# Altium PCB cyu1pcb.PcbDoc
Units mm, origin at the board's own origin, x right, y up, seen from the top; angles counter-clockwise.
Board outline 73.15 x 68.45 mm, 2 copper layers (Top Layer, Bottom Layer); 41 components, 44 nets, 116 pads, 4 vias.
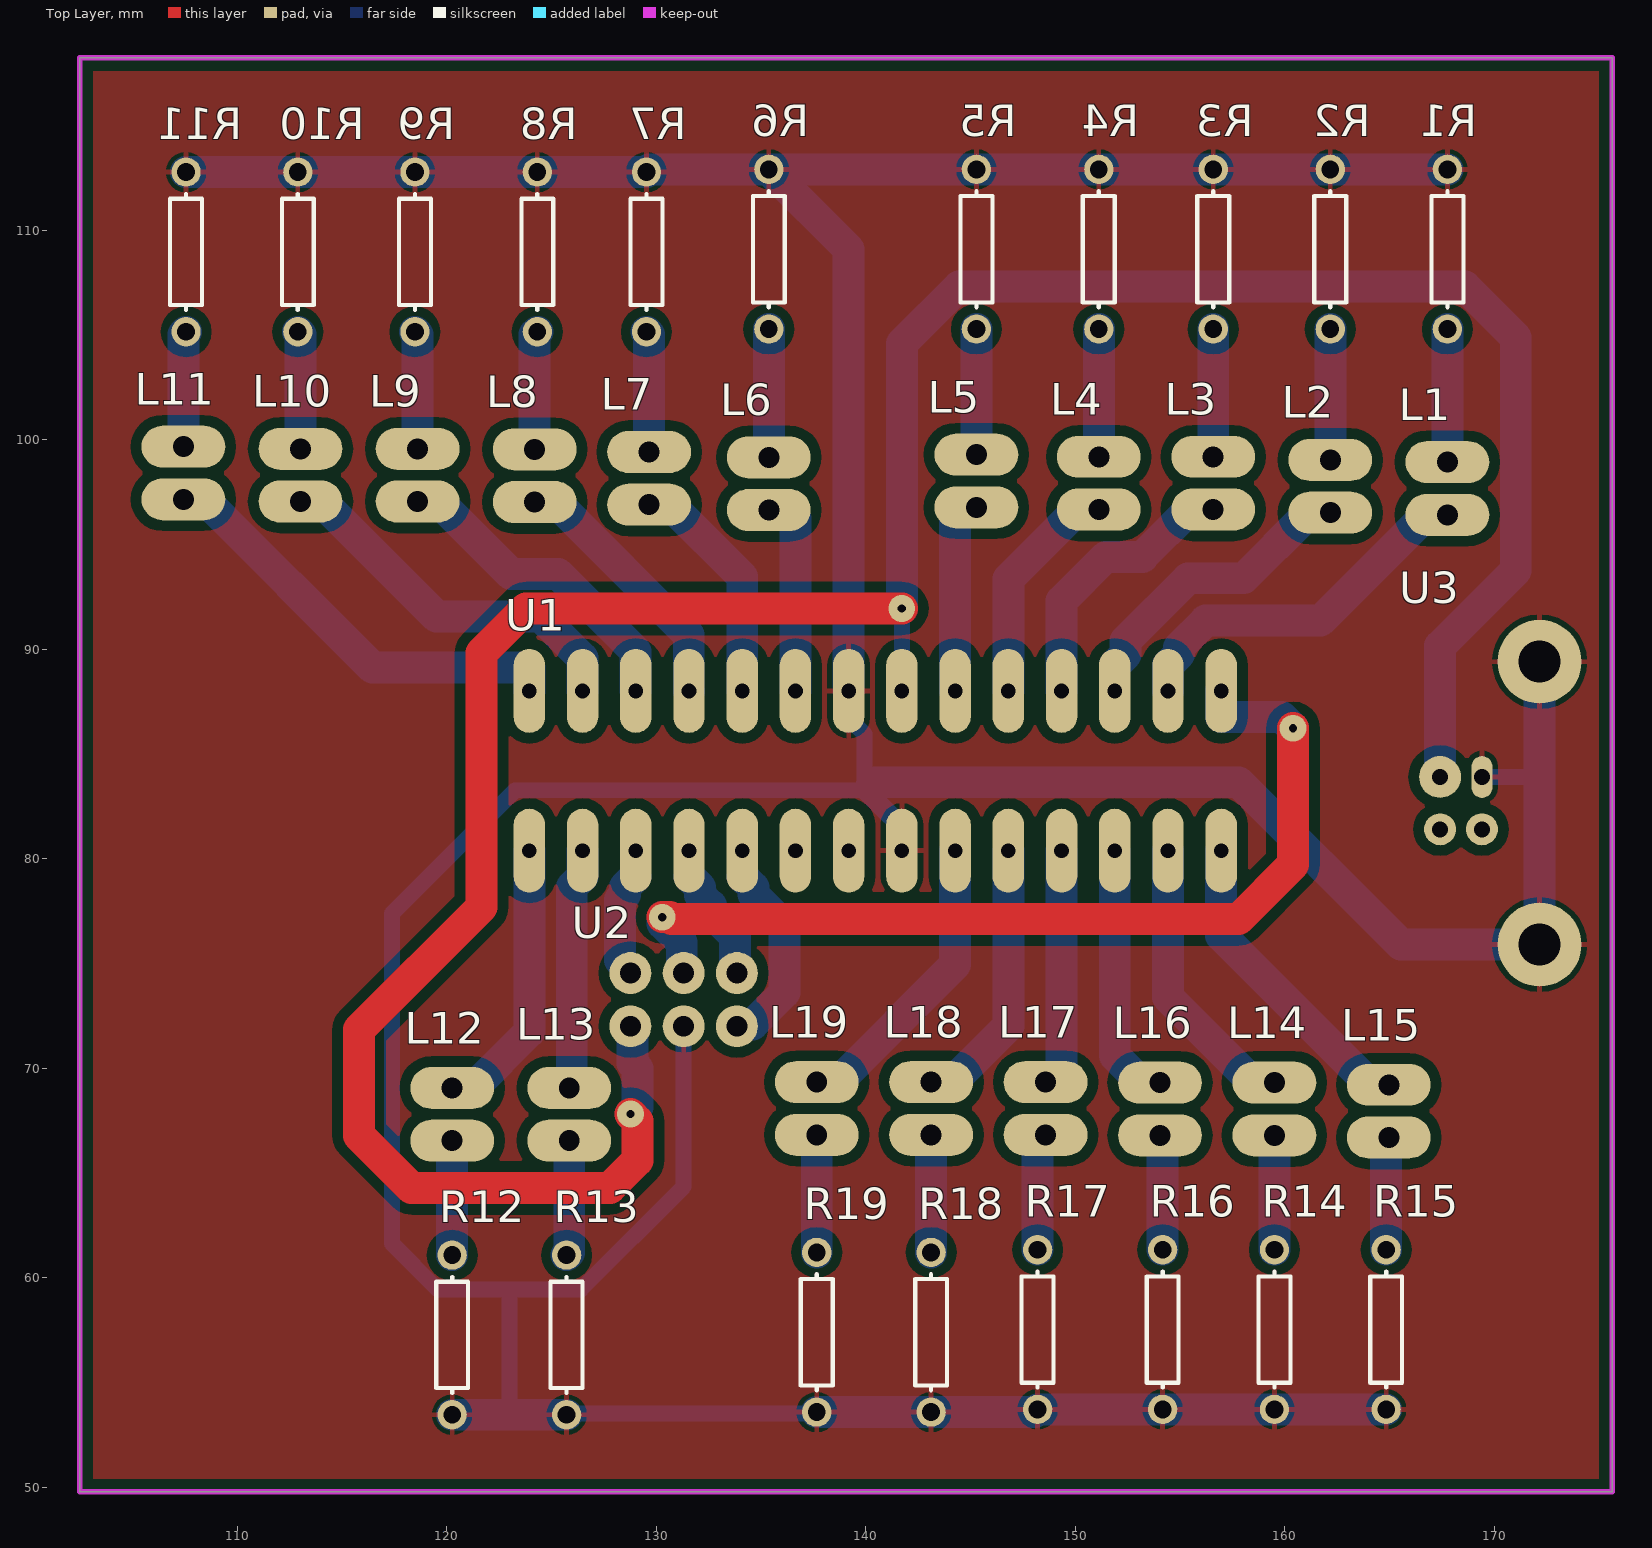
[diagram p0: Top Layer view]
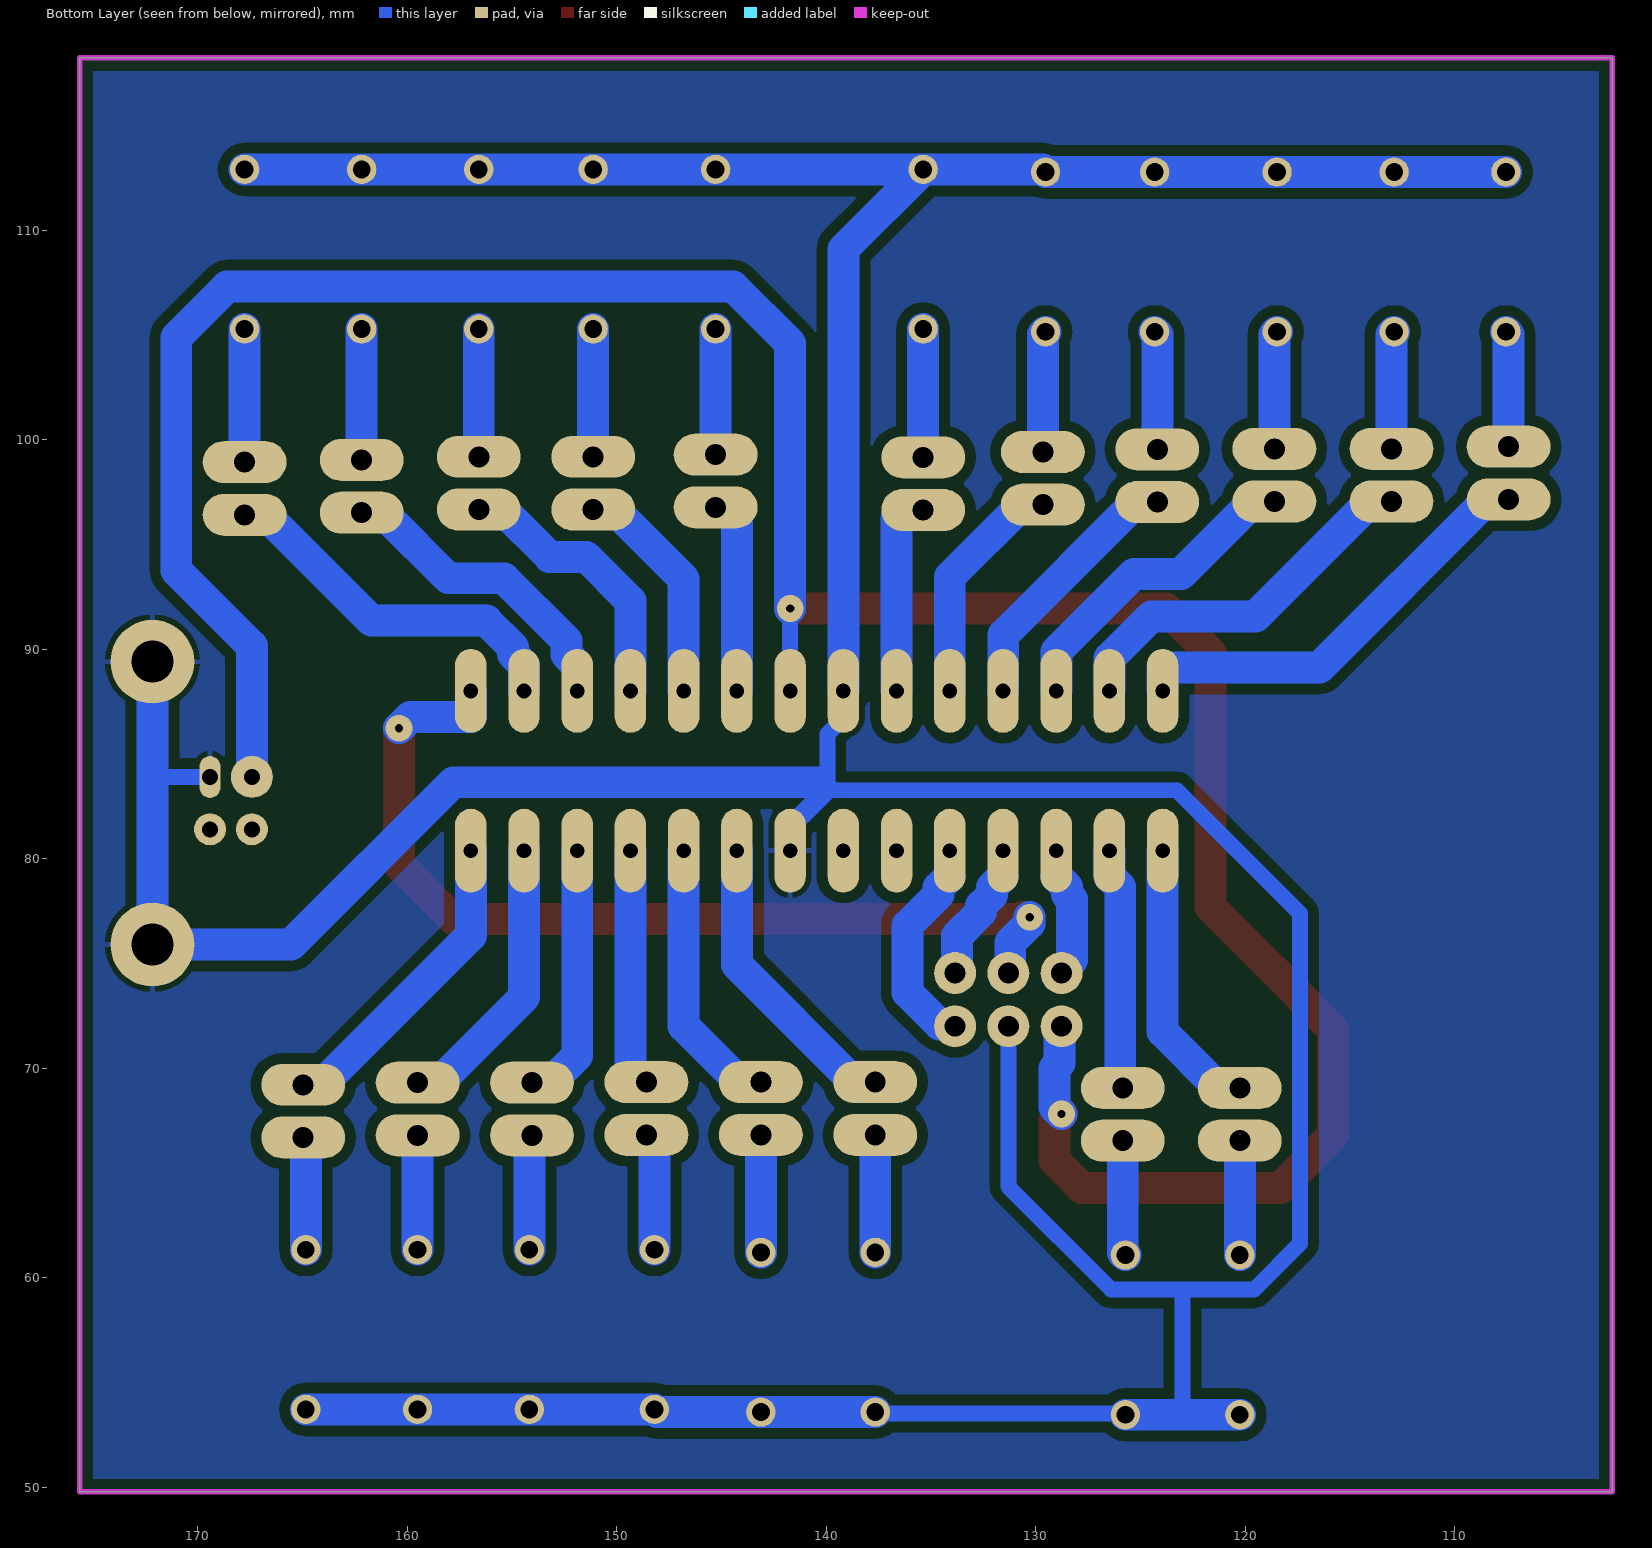
[diagram p1: Bottom Layer view, seen from below]
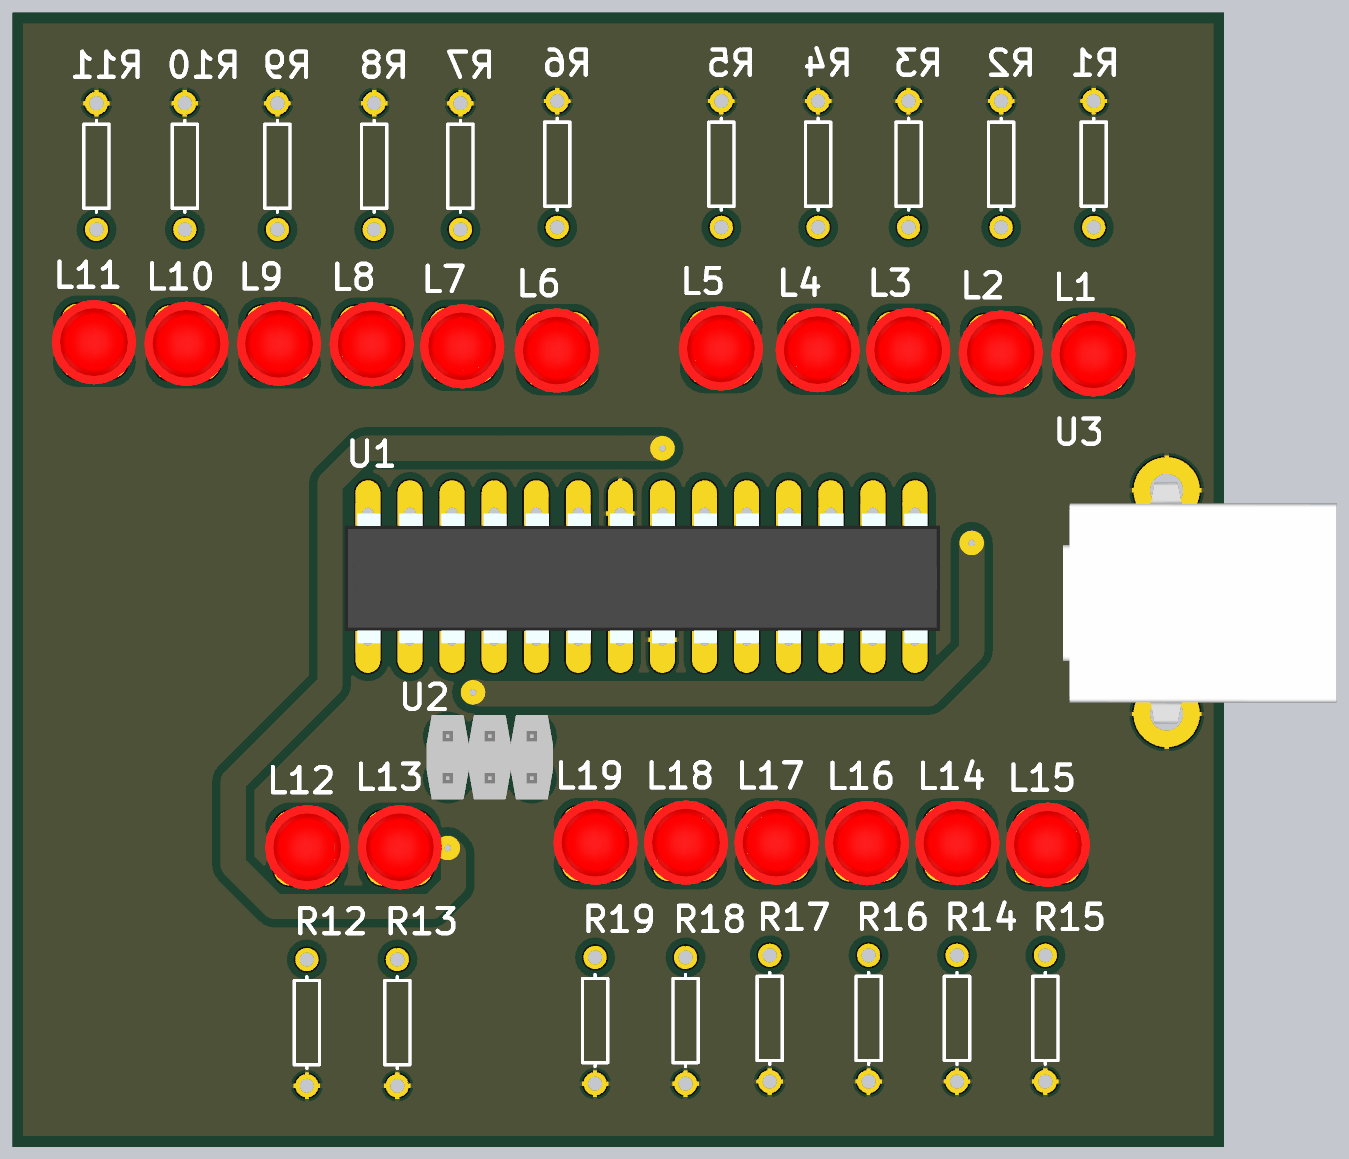
[diagram p2: 3D render of the assembled board from above, using the file's embedded part models]

## Layer stack, top to bottom
Top Solder: solder mask 0.0102, Solder Resist, Dk 3.5
Top Layer: signal copper 0.0356
Dielectric 1: dielectric 0.32, FR-4, Dk 4.8
Bottom Layer: signal copper 0.0356
Bottom Solder: solder mask 0.0102, Solder Resist, Dk 3.5

## Board outline
102.489,49.784 102.489,118.237 175.641,118.237 175.641,49.784

## Design rules (kind name [scope] priority, off if disabled: settings)
Clearance [All] p1: gap=0.5 ignorepadtopadclearanceinfootprint=FALSE
PolygonConnect [All] p1: connectstyle=Relief reliefconductorwidth=0.254 reliefentries=4 polygonreliefangle="90 Angle" airgapwidth=0.254
RoutingVias [All] p1: holewidth=0.711 width=1.27 viastyle="Through Hole" minholewidth=0.711 minwidth=1.27 maxholewidth=0.711 maxwidth=1.27
SolderMaskExpansion [All] p1: expansion=0.102 istentingtop=FALSE
Width [All] p1: maxlimit=1.524 minlimit=0.508 preferedwidth=0.762
30 further rules are at their usual default settings.

## Components (designator, comment, footprint, x,y, rotation, side; value= is the part's Value field where it differs from the comment)
L1 "LED" LEDth 167.767,96.393 r0 top value=Red
L2 "LED" LEDth 162.179,96.495 r0 top value=Red
L3 "LED" LEDth 156.591,96.647 r0 top value=Red
L4 "LED" LEDth 151.13,96.647 r0 top value=Red
L5 "LED" LEDth 145.288,96.749 r0 top value=Red
L6 "LED" LEDth 135.382,96.622 r0 top value=Red
L7 "LED" LEDth 129.667,96.876 r0 top value=Red
L8 "LED" LEDth 124.206,97.003 r0 top value=Red
L9 "LED" LEDth 118.618,97.028 r0 top value=Red
L10 "LED" LEDth 113.03,97.028 r0 top value=Red
L11 "LED" LEDth 107.442,97.13 r0 top value=Red
L12 "LED" LEDth 120.269,69.088 r180 top value=Red
L13 "LED" LEDth 125.857,69.088 r180 top value=Red
L14 "LED" LEDth 159.512,69.342 r180 top value=Red
L15 "LED" LEDth 164.973,69.24 r180 top value=Red
L16 "LED" LEDth 154.051,69.342 r180 top value=Red
L17 "LED" LEDth 148.59,69.367 r180 top value=Red
L18 "LED" LEDth 143.129,69.367 r180 top value=Red
L19 "LED" LEDth 137.668,69.367 r180 top value=Red
R1 "Res1" AXIAL-0.3 167.767,109.093 r270 top value=1K
R2 "Res1" AXIAL-0.3 162.179,109.093 r270 top value=1K
R3 "Res1" AXIAL-0.3 156.591,109.093 r270 top value=1K
R4 "Res1" AXIAL-0.3 151.13,109.093 r270 top value=1K
R5 "Res1" AXIAL-0.3 145.288,109.093 r270 top value=1K
R6 "Res1" AXIAL-0.3 135.382,109.093 r270 top value=1K
R7 "Res1" AXIAL-0.3 129.54,108.966 r270 top value=1K
R8 "Res1" AXIAL-0.3 124.333,108.966 r270 top value=1K
R9 "Res1" AXIAL-0.3 118.491,108.966 r270 top value=1K
R10 "Res1" AXIAL-0.3 112.903,108.966 r270 top value=1K
R11 "Res1" AXIAL-0.3 107.569,108.966 r270 top value=1K
R12 "Res1" AXIAL-0.3 120.269,57.277 r90 top value=1K
R13 "Res1" AXIAL-0.3 125.73,57.277 r90 top value=1K
R14 "Res1" AXIAL-0.3 159.512,57.531 r90 top value=1K
R15 "Res1" AXIAL-0.3 164.846,57.531 r90 top value=1K
R16 "Res1" AXIAL-0.3 154.178,57.531 r90 top value=1K
R17 "Res1" AXIAL-0.3 148.209,57.531 r90 top value=1K
R18 "Res1" AXIAL-0.3 143.129,57.404 r90 top value=1K
R19 "Res1" AXIAL-0.3 137.668,57.404 r90 top value=1K
U1 "Atmega88" ATMEGA328 156.972,88.011 r270 top
U2 "DebugWireISP" 6x2pinheader 133.858,74.549 r270 top
U3 "ETF USB B type" USB-B 179.918,83.157 r0 top value=Yes

## Footprints (in the part's own frame and the unit in brackets; to place one, negate y for a bottom-side part, rotate by r counter-clockwise, add the part's x,y. Pads: shape width x height; smd on the part's side, far side on the other; paste and mask are expansions set on the pad)
6x2pinheader [mm] "ETF 6x2 pin header"
  round 2 hole 1: 1(0,0) 2(2.54,0) 3(0,-2.54) 4(2.54,-2.54) 5(0,-5.08) 6(2.54,-5.08)
  body extent -1.29,-6.36 3.79,1.26, height 9.75
ATMEGA328 [mm]
  oval 4x1.5 hole 0.7: 1(0,0) 2(0,-2.54) 3(0,-5.08) 4(0,-7.62) 5(0,-10.16) 6(0,-12.7) 7(0,-15.24) 8(0,-17.78) 9(0,-20.32) 10(0,-22.86) 11(0,-25.4) 12(0,-27.94) 13(0,-30.48) 14(0,-33.02) 15(7.62,-33.02) 16(7.62,-30.48) 17(7.62,-27.94) 18(7.62,-25.4) 19(7.62,-22.86) 20(7.62,-20.32) 21(7.62,-17.78) 22(7.62,-15.24) 23(7.62,-12.7) 24(7.62,-10.16) 25(7.62,-7.62) 26(7.62,-5.08) 27(7.62,-2.54) 28(7.62,0)
  body extent -0.03,-34.42 7.85,1.52, height 4.65
AXIAL-0.3 [mm] "Axial Device, Thru-Hole; 2 Leads; 0.3 in Pin Spacing"
  round 1.4 hole 0.85: 1(-3.81,0) 2(3.81,0)
  silkscreen extent -2.77,-0.76 2.77,0.76
LEDth [mm]
  oval 4x2 hole 1: 1(0,2.54) 2(0,0.025)
  body extent -2.57,-1.32 2.53,3.78, height 8.6
USB-B [mm] "ETF USB port type B"
  round 2 hole 0.762: 1(-12.5,0.75)
  round 1.524 hole 0.762: 2(-12.5,-1.75) 3(-10.5,-1.75)
  oval 1x2 hole 0.762: 4(-10.5,0.75)
  round 4 hole 2: 4(-7.75,-7.25) 4(-7.75,6.25)
  body extent -14,-7.85 2.5,6.75, height 11.28

## Part data
L1 L2 L3 L4 L5 L6 L7 L8 L9 L10 L11 L12 L13 L14 L15 L16 L17 L18 L19: library part LEDth
R1 R2 R3 R4 R5 R6 R7 R8 R9 R10 R11 R12 R13 R14 R15 R16 R17 R18 R19: "Resistor", LatestRevisionDate=17-Jul-2002, LatestRevisionNote="Re-released for DXP Platform.", PackageDescription="Axial Device, Thru-Hole; 2 Leads; 0.3 in Pin Spacing", PackageReference=AXIAL-0.3, Published=8-Jun-2000, Publisher="Altium Limited"
U3: library part USB-B

## Via types
v1: diameter 1.27, hole 0.4, Top Layer to Bottom Layer, 4 vias

## Nets (pads, with @x,y where several pads share a name; then routed paths per layer and width w, separated by ;. In a path a pad name is that pad's centre, name@x,y a point inside that pad or via, vN(x,y) a via of type N, cw(c..) or ccw(c..) an arc to the next point about the centre after c; other vN are vias at no path point)
GND: R1.1 R2.1 R3.1 R4.1 R5.1 R6.1 R7.1 R8.1 R9.1 R10.1 R11.1 R12.1 R13.1 R14.1 R15.1 R16.1 R17.1 R18.1 R19.1 U1.8 U1.22 U2.4 U3.4 | length 266.6
  Bottom Layer w0.762: 122.936,53.467 122.999,53.53 122.999,59.444 ; R13.1 125.793,53.53 137.605,53.53 R19.1 ; U2.4 131.318,64.351 126.411,59.444 122.999,59.444 ; U1.8 139.192,86.708 139.954,85.946 139.954,83.272 ; U3.4@169.418,83.907 171.954,83.907 172.168,83.693 ; 122.999,59.444 119.588,59.444 117.388,61.644 117.388,77.384 123.276,83.272 139.954,83.272 ; 139.954,83.272 139.954,83.186 141.13,82.01 141.163,82.01 141.732,81.441 U1.22 141.732,81.641 140.101,83.272 139.954,83.272
  Bottom Layer w1.524: R11.1 R10.1 R9.1 R8.1 R7.1 129.667,112.903 R6.1 ; R12.1 122.936,53.467 R13.1 ; R19.1 R18.1 148.082,53.594 R17.1 R14.1 R15.1 ; U1.8 139.192,109.093 R6.1 ; 140.254,83.425 140.482,83.653 157.805,83.653 165.551,75.907 172.168,75.907 172.168,83.693 U3.4@172.168,89.407 ; R1.1 R2.1 R3.1 R4.1 R5.1 R6.1
MISO: U1.18 U2.1 | length 5.5
  Bottom Layer w1.524: U1.18@131.584,79.153 132.1,78.637 132.1,78.28 132.616,77.764 132.616,77.469 133.767,76.318 133.767,74.64 U2.1
MOSI: U1.17 U2.5 | length 5.1
  Bottom Layer w1.524: U2.5 128.778,74.678 128.278,75.178 128.278,78.054 128.516,78.292 128.516,78.649 U1.17@129.02,79.153
NetL1_1: L1.1 R1.2 | length 6.3
  Bottom Layer w1.524: L1.1 R1.2
NetL1_2: L1.2 U1.2 | length 17.7
  Bottom Layer w1.524: U1.2 154.432,89.237 154.96,89.765 154.96,90.094 156.232,91.367 161.716,91.367 166.767,96.418 L1.2
NetL2_1: L2.1 R2.2 | length 6.2
  Bottom Layer w1.524: L2.1 R2.2
NetL2_2: L2.2 U1.3 | length 13.7
  Bottom Layer w1.524: U1.3@151.904,89.249 152.408,89.753 152.408,90.405 155.394,93.391 158.05,93.391 161.024,96.365 162.024,96.365 L2.2
NetL3_1: L3.1 R3.2 | length 6.1
  Bottom Layer w1.524: L3.1 R3.2
NetL3_2: L3.2 U1.4 | length 13.3
  Bottom Layer w1.524: U1.4 149.352,92.297 151.465,94.41 153.206,94.41 155.468,96.672 L3.2
NetL4_1: L4.1 R4.2 | length 6.1
  Bottom Layer w1.524: L4.1 R4.2
NetL4_2: L4.2 U1.5 | length 11
  Bottom Layer w1.524: U1.5 146.812,93.354 150.13,96.672 L4.2
NetL5_1: L5.1 R5.2 | length 6
  Bottom Layer w1.524: L5.1 R5.2
NetL5_2: L5.2 U1.6 | length 9.7
  Bottom Layer w1.524: U1.6 144.272,96.554 144.492,96.774 L5.2
NetL6_1: L6.1 R6.2 | length 6.1
  Bottom Layer w1.524: L6.1 R6.2
NetL6_2: L6.2 U1.9 | length 9.7
  Bottom Layer w1.524: L6.2 136.253,96.647 136.652,96.248 U1.9
NetL7_1: L7.1 R7.2 | length 5.8
  Bottom Layer w1.524: R7.2 129.667,105.029 L7.1
NetL7_2: L7.2 U1.10 | length 11.3
  Bottom Layer w1.524: L7.2 130.667,96.901 134.112,93.456 U1.10
NetL8_1: L8.1 R8.2 | length 5.7
  Bottom Layer w1.524: L8.1 124.206,105.029 R8.2
NetL8_2: L8.2 U1.11 | length 12.7
  Bottom Layer w1.524: L8.2 125.206,97.028 131.56,90.674 131.56,88.023 U1.11
NetL9_1: L9.1 R9.2 | length 5.6
  Bottom Layer w1.524: R9.2 118.618,105.029 L9.1
NetL9_2: L9.2 U1.12 | length 15.3
  Bottom Layer w1.524: L9.2 119.618,97.053 123.08,93.591 125.33,93.591 129.02,89.901 129.02,88.023 U1.12
NetL10_1: L10.1 R10.2 | length 5.6
  Bottom Layer w1.524: R10.2 113.03,105.029 L10.1
NetL10_2: L10.2 U1.13 | length 18.1
  Bottom Layer w1.524: L10.2 114.03,97.053 119.516,91.567 124.491,91.567 126.48,89.578 126.48,88.023 U1.13
NetL11_1: L11.1 R11.2 | length 5.5
  Bottom Layer w1.524: L11.1 107.442,105.029 R11.2
NetL11_2: L11.2 U1.14 | length 20.9
  Bottom Layer w1.524: L11.2 108.442,97.155 116.467,89.13 123.94,89.13 123.952,89.118 U1.14
NetL12_1: L12.1 R12.2 | length 5.5
  Bottom Layer w1.524: R12.2 L12.1
NetL12_2: L12.2 U1.15 | length 13.4
  Bottom Layer w1.524: L12.2 121.269,69.063 123.952,71.746 U1.15
NetL13_1: L13.1 R13.2 | length 5.5
  Bottom Layer w1.524: R13.2 125.857,61.214 L13.1
NetL13_2: L13.2 U1.16 | length 11.6
  Bottom Layer w1.524: L13.2 125.976,69.182 125.976,78.649 126.492,79.165 U1.16
NetL14_1: L14.1 R14.2 | length 5.5
  Bottom Layer w1.524: R14.2 L14.1
NetL14_2: L14.2 U1.27 | length 13.8
  Bottom Layer w1.524: U1.27 154.432,73.397 158.512,69.317 L14.2
NetL15_1: L15.1 R15.2 | length 5.4
  Bottom Layer w1.524: R15.2 164.846,66.573 L15.1
NetL15_2: L15.2 U1.28 | length 15
  Bottom Layer w1.524: U1.28 156.972,76.345 164.102,69.215 L15.2
NetL16_1: L16.1 R16.2 | length 5.5
  Bottom Layer w1.524: L16.1 154.178,66.675 R16.2
NetL16_2: L16.2 U1.26 | length 12.5
  Bottom Layer w1.524: U1.26 151.892,70.605 153.18,69.317 L16.2
NetL17_1: L17.1 R17.2 | length 5.7
  Bottom Layer w1.524: R17.2 148.209,66.607 148.429,66.827 L17.1
NetL17_2: L17.2 U1.25 | length 11.7
  Bottom Layer w1.524: L17.2 149.132,69.342 149.352,69.562 U1.25
NetL18_1: L18.1 R18.2 | length 5.6
  Bottom Layer w1.524: R18.2 L18.1
NetL18_2: L18.2 U1.24 | length 13.2
  Bottom Layer w1.524: L18.2 144.129,69.342 146.812,72.025 U1.24
NetL19_1: L19.1 R19.2 | length 5.6
  Bottom Layer w1.524: R19.2 L19.1
NetL19_2: L19.2 U1.23 | length 14.4
  Bottom Layer w1.524: L19.2 138.668,69.342 144.272,74.946 U1.23
RST: U1.1 U2.3 | length 45.7
  Top Layer w1.524: v1(130.302,77.216) 130.652,77.216 130.739,77.129 157.805,77.129 160.401,79.725 v1(160.401,86.233)
  Bottom Layer w1.524: v1(130.302,77.216) 130.302,76.922 131.151,76.073 ; 131.151,76.072 131.227,75.996 131.227,74.64 U2.3 ; U1.1 156.972,86.785 156.984,86.773 159.861,86.773 v1(160.401,86.233)
SCK: U1.19 U2.2 | length 9.3
  Bottom Layer w1.524: U2.2 133.949,72.1 134.608,72.1 136.12,73.612 136.12,76.828 134.64,78.308 134.64,78.637 U1.19@134.124,79.153
VCC: U1.7 U2.6 U3.1 | length 138.6
  Top Layer w1.524: v1(128.778,67.818) 129.119,67.477 129.119,65.611 127.794,64.286 118.332,64.286 115.824,66.794 115.824,71.849 121.666,77.691 121.666,89.82 123.794,91.948 v1(141.732,91.948)
  Bottom Layer w0.762: U1.7 v1(141.732,91.948)
  Bottom Layer w1.524: v1(128.778,67.818) 129.119,68.159 129.119,70 128.869,70.25 128.869,71.918 U2.6 ; v1(141.732,91.948) 141.732,104.589 144.45,107.307 168.605,107.307 171.029,104.883 171.029,93.758 167.418,90.147 U3.1
pads on no net: U1.20 U1.21 U3.2 U3.3

## Polygon pours and split planes (outlines as drawn)
GND on Top Layer "GND_L01_P002" (solid, remove dead copper, pour order 2): 102.489,49.784 102.489,118.237 175.641,118.237 175.641,49.784
GND on Bottom Layer "GND_L02_P003" (solid, remove dead copper, pour order 3): 102.489,49.784 102.489,118.237 175.641,118.237 175.641,49.784

## Keep-outs
Keep-Out Layer:
  the board outline again, w0.254